# EAGLE board Projeto Rotas v18 (EAGLE 9.7.0)
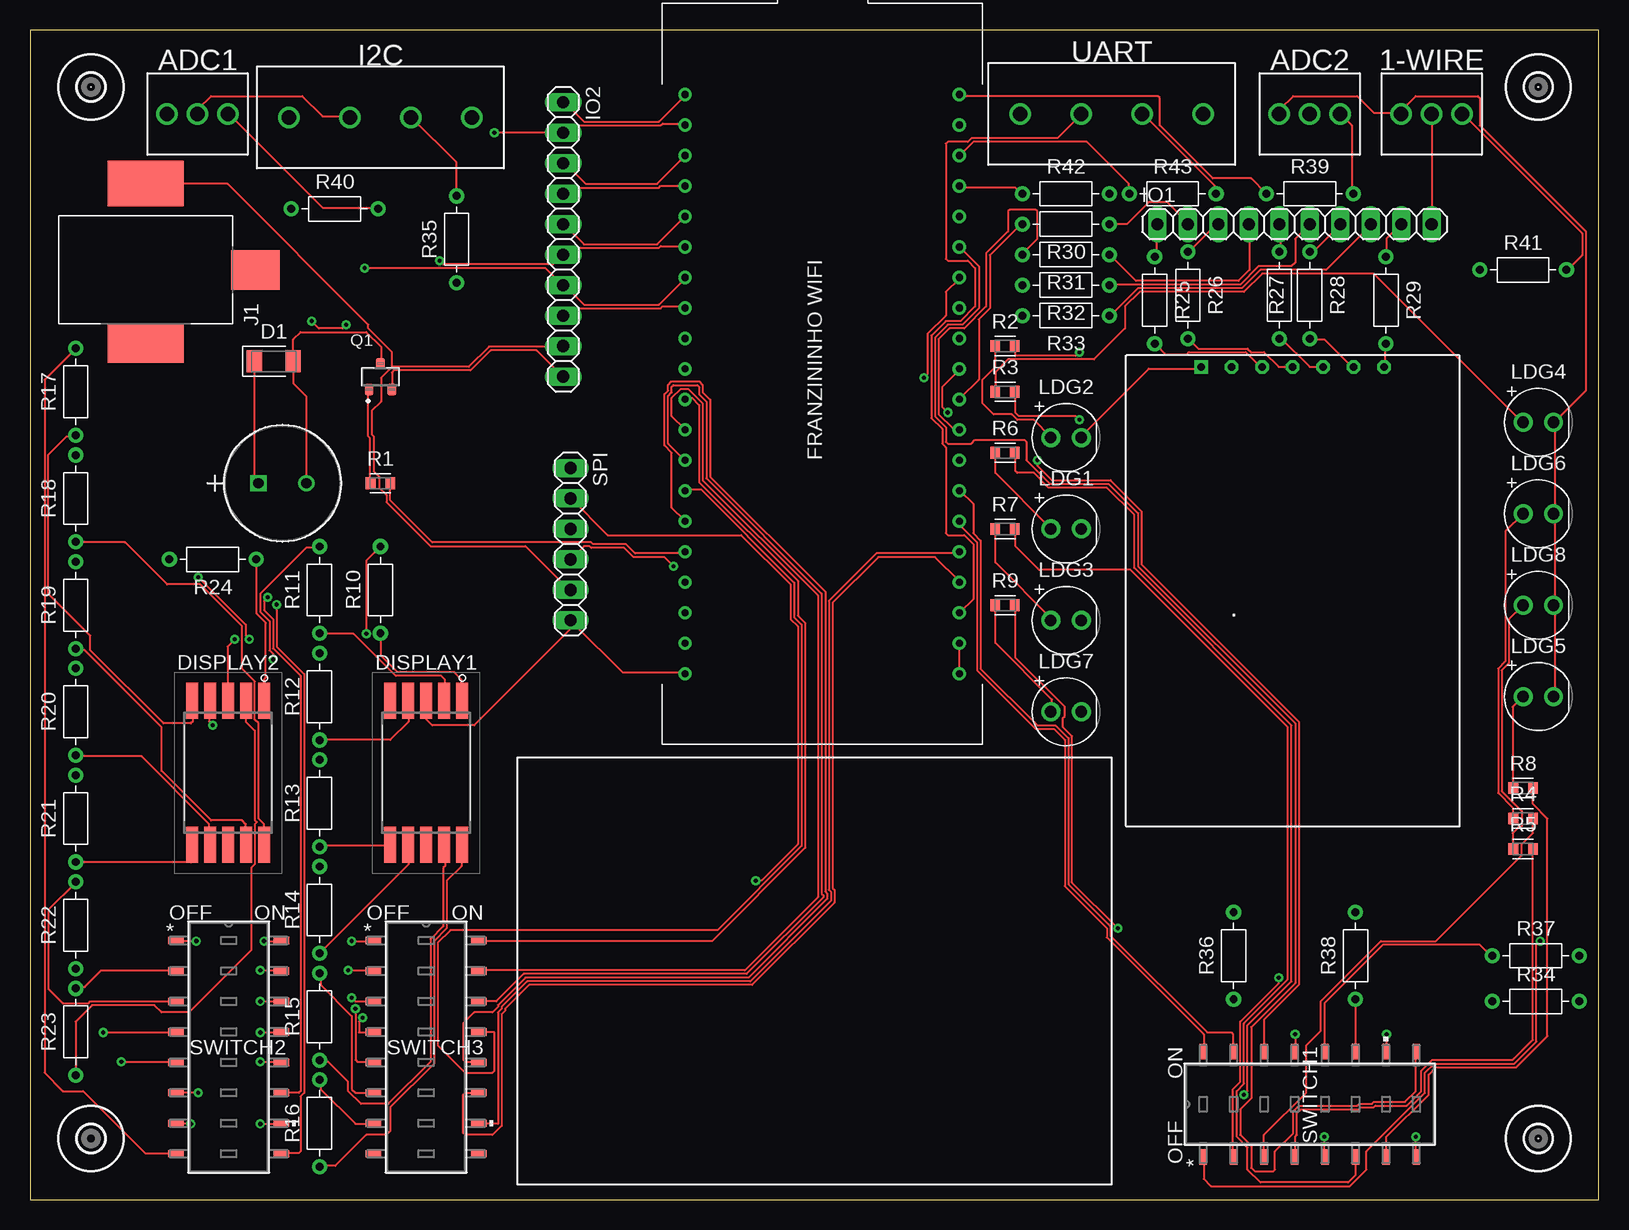
[diagram p0: board, top side]
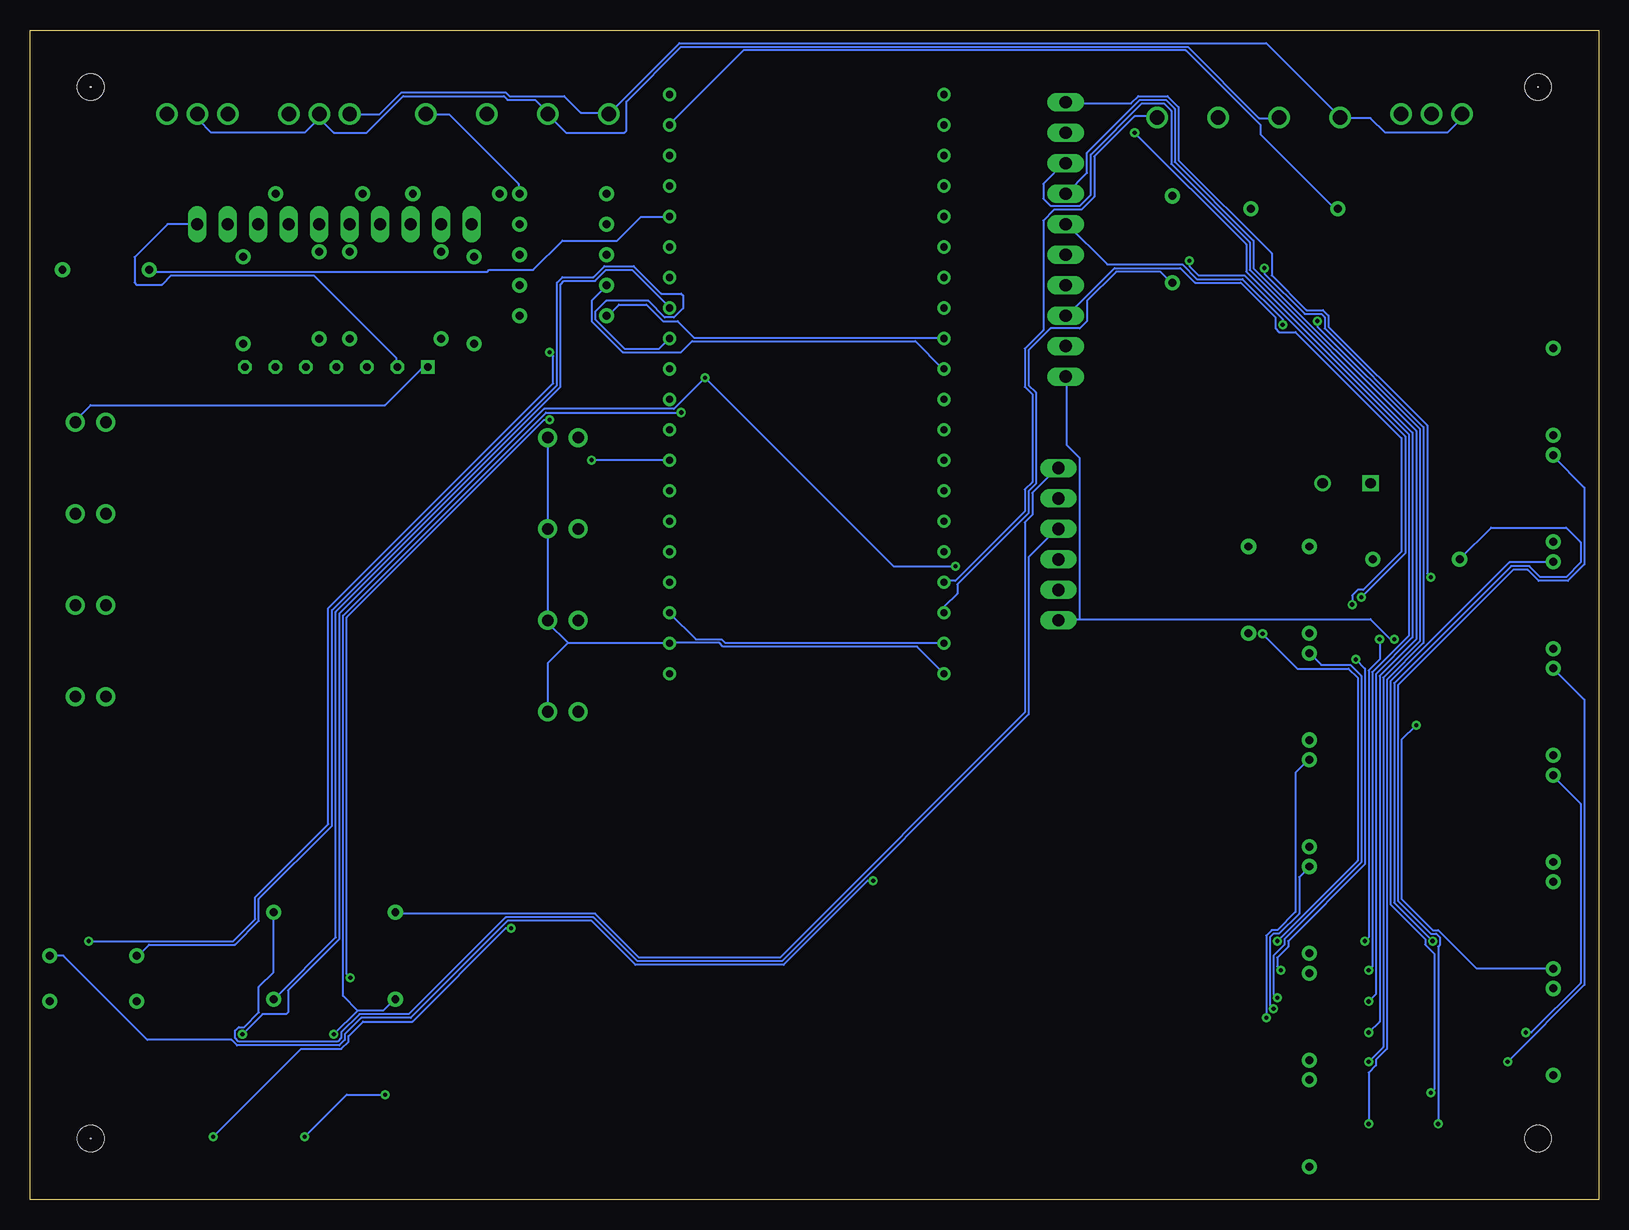
[diagram p1: board, bottom side, seen from below]

Size 130.79 x 97.46 mm. Coordinates in mm from the lower left corner, seen from the top.
Outline: 0,0 130.79,0 130.79,97.46 0,97.46 0,0
Copper layers (1*16): Top / Bottom
Stack-up Default Layer Stack: Top User Defined 0.035mm / Dielectric-1 User Defined 1.5mm / Bottom User Defined 0.035mm
Design rules "default": minimum track width 6mil, minimum drill 0.35mm, track to track 6mil, track to pad 6mil, pad to pad 6mil, via to via 6mil, smd to smd 6mil, copper to edge 40mil, drill to drill 6mil, minimum pad ring 10mil, minimum via ring 8mil, stop-mask expansion 4mil, vias tented up to drill 0mil, thermal gap 10mil
Holes 0.06 mm at 125.73,5.08 125.73,92.71 5.08,92.71

## Footprints (pad centres in the part's own frame; a part is rotated, then mirrored left to right if it is on the bottom)
TERMBLK_254-3N = drill 1.2: 1 0,0; 2 2.54,0; 3 5.08,0
TFT = drill 0.6 octagon: BLK 7.46,17.31; DC 4.92,17.31; RES 2.38,17.31; SCL -2.7,17.31; SDA -0.16,17.31; VCC -5.24,17.31 | drill 0.6 square: GND -7.78,17.31
PB-09N23P-03Q_MAL = drill 0.864 pad 1.372 square: 1 0,0 | drill 0.864 pad 1.372: 2 4,0
DIOMELF3516 = smd 1.275 x 1.85: 1 -1.62,0; 2 1.62,0
ACSA0341SRWAF01 = smd 1 x 3: 1 -3,-6; 2 -1.5,-6; 3 0,-6; 4 1.5,-6; 5 3,-6; 6 3,6; 7 1.5,6; 8 0,6; 9 -1.5,6; 10 -3,6
2,2 = hole 2.2: 0,0
TERMBLK_508-4N = drill 1.2: 1 0,0; 2 5.08,0; 3 10.16,0; 4 15.24,0
1X10 = drill 1.016 long: 1 -11.43,0; 2 -8.89,0; 3 -6.35,0; 4 -3.81,0; 5 -1.27,0; 6 1.27,0; 7 3.81,0; 8 6.35,0; 9 8.89,0; 10 11.43,0
RASM722X = smd 3.3 x 4.06: PIN 0,9.14 | smd 3.3 x 6.35: SHUNT 6.1,0 | smd 3.81 x 6.35: SLEEVE -7.19,0
LEDGR254W60D565H860B_Y = drill 0.981 pad 1.581: 1 -1.27,0; 2 1.27,0
SOT23 = smd 0.71 x 0.96: 1 -0.95,-1.075; 2 0.95,-1.075; 3 0,1.075
RESC1608X60 = smd 0.799 x 0.974: 1 -0.815,0; 2 0.815,0
RESAD724W46L381D178B = drill 0.66 pad 1.26: 1 -3.62,0; 2 3.62,0
1X06 = drill 1.016 long: 1 -6.35,0; 2 -3.81,0; 3 -1.27,0; 4 1.27,0; 5 3.81,0; 6 6.35,0
SWSO16_386X100P100-L = smd 1.295 x 0.61: 1 -4.407,8.89; 2 -4.407,6.35; 3 -4.407,3.81; 4 -4.407,1.27; 5 -4.407,-1.27; 6 -4.407,-3.81; 7 -4.407,-6.35; 8 -4.407,-8.89; 9 4.407,-8.89; 10 4.407,-6.35; 11 4.407,-3.81; 12 4.407,-1.27; 13 4.407,1.27; 14 4.407,3.81; 15 4.407,6.35; 16 4.407,8.89
FRANZININHO = drill 0.6: 3V3 -11.43,-21.59; 5V 11.43,-19.05; GND1 -11.43,-24.13; GND2 11.43,-21.59; GND3 11.43,-24.13; GPIO0 -11.43,24.13; GPIO1 -11.43,21.59; GPIO2 -11.43,19.05; GPIO3 -11.43,16.51; GPIO4 -11.43,13.97; GPIO5 -11.43,11.43; GPIO6 -11.43,8.89; GPIO7 -11.43,6.35; GPIO8 -11.43,-16.51; GPIO9 -11.43,-19.05; GPIO10 -11.43,3.81; GPIO11 -11.43,1.27; GPIO12 -11.43,-1.27; GPIO13 -11.43,-3.81; GPIO14 -11.43,-6.35; GPIO15 -11.43,-8.89; GPIO16 -11.43,-11.43; GPIO17 -11.43,-13.97; GPIO18 11.43,-16.51; GPIO21 11.43,-13.97; GPIO26 11.43,-11.43; GPIO33 11.43,-8.89; GPIO34 11.43,-6.35; GPIO35 11.43,-3.81; GPIO36 11.43,-1.27; GPIO37 11.43,1.27; GPIO38 11.43,3.81; GPIO39 11.43,6.35; GPIO40 11.43,8.89; GPIO41 11.43,11.43; GPIO42 11.43,13.97; GPIO43 11.43,16.51; GPIO44 11.43,19.05; GPIO45 11.43,21.59; GPIO46 11.43,24.13

## Placement (x,y rotation side)
1-WIRE  2828XX-3282834-3  [TERMBLK_254-3N]  119.38,90.46 180 top
.  DISPLAY240X240IPSTFT  [TFT]  105.41,52.07 0 top
ADC1  2828XX-3282834-3  [TERMBLK_254-3N]  16.51,90.46 180 top
ADC2  2828XX-3282834-3  [TERMBLK_254-3N]  109.22,90.46 180 top
BUZZER  PB-09N23P-03QPB-09N23P-03Q_MAL  [PB-09N23P-03Q_MAL]  19.05,59.69 0 top
D1  LL4148  [DIOMELF3516]  20.32,69.85 0 top
DISPLAY1  ACSA03-41  [ACSA0341SRWAF01]  33.02,35.56 180 top
DISPLAY2  ACSA03-41  [ACSA0341SRWAF01]  16.51,35.56 180 top
H1  MOUNT-HOLE2.2  [2,2]  125.73,5.08 0 top
H2  MOUNT-HOLE2.2  [2,2]  5.08,5.08 0 top
H3  MOUNT-HOLE2.2  [2,2]  125.73,92.71 0 top
H4  MOUNT-HOLE2.2  [2,2]  5.08,92.71 0 top
I2C  2828XX-4282837-4  [TERMBLK_508-4N]  36.83,90.17 180 top
IO1  PINHD-1X10  [1X10]  105.41,81.28 0 top
IO2  PINHD-1X10  [1X10]  44.45,80.01 270 top
J1  RASM722  [RASM722X]  9.65,77.47 270 top
LDG1  [LEDGR254W60D565H860B_Y]  86.36,55.88 0 top
LDG2  [LEDGR254W60D565H860B_Y]  86.36,63.5 0 top
LDG3  [LEDGR254W60D565H860B_Y]  86.36,48.26 0 top
LDG4  [LEDGR254W60D565H860B_Y]  125.73,64.77 0 top
LDG5  [LEDGR254W60D565H860B_Y]  125.73,41.91 0 top
LDG6  [LEDGR254W60D565H860B_Y]  125.73,57.15 0 top
LDG7  [LEDGR254W60D565H860B_Y]  86.36,40.64 0 top
LDG8  [LEDGR254W60D565H860B_Y]  125.73,49.53 0 top
Q1  MMBT3904  [SOT23]  29.21,68.58 0 top
R1  [RESC1608X60]  29.21,59.69 0 top
R2  [RESC1608X60]  81.28,71.12 0 top
R3  [RESC1608X60]  81.28,67.31 0 top
R4  [RESC1608X60]  124.46,31.75 0 top
R5  [RESC1608X60]  124.46,29.21 0 top
R6  [RESC1608X60]  81.28,62.23 0 top
R7  [RESC1608X60]  81.28,55.88 0 top
R8  [RESC1608X60]  124.46,34.29 0 top
R9  [RESC1608X60]  81.28,49.53 0 top
R10  [RESAD724W46L381D178B]  29.21,50.8 90 top
R11  [RESAD724W46L381D178B]  24.13,50.8 90 top
R12  [RESAD724W46L381D178B]  24.13,41.91 90 top
R13  [RESAD724W46L381D178B]  24.13,33.02 90 top
R14  [RESAD724W46L381D178B]  24.13,24.13 90 top
R15  [RESAD724W46L381D178B]  24.13,15.24 90 top
R16  [RESAD724W46L381D178B]  24.13,6.35 90 top
R17  [RESAD724W46L381D178B]  3.81,67.31 90 top
R18  [RESAD724W46L381D178B]  3.81,58.42 90 top
R19  [RESAD724W46L381D178B]  3.81,49.53 90 top
R20  [RESAD724W46L381D178B]  3.81,40.64 90 top
R21  [RESAD724W46L381D178B]  3.81,31.75 90 top
R22  [RESAD724W46L381D178B]  3.81,22.86 90 top
R23  [RESAD724W46L381D178B]  3.81,13.97 90 top
R24  [RESAD724W46L381D178B]  15.24,53.34 180 top
R25  [RESAD724W46L381D178B]  93.75,74.93 270 top
R26  [RESAD724W46L381D178B]  96.52,75.35 270 top
R27  [RESAD724W46L381D178B]  104.14,75.35 270 top
R28  [RESAD724W46L381D178B]  106.68,75.35 270 top
R29  [RESAD724W46L381D178B]  113.03,74.93 270 top
R30  [RESAD724W46L381D178B]  86.36,81.28 180 top
R31  [RESAD724W46L381D178B]  86.36,78.74 180 top
R32  [RESAD724W46L381D178B]  86.36,76.2 180 top
R33  [RESAD724W46L381D178B]  86.36,73.66 180 top
R34  [RESAD724W46L381D178B]  125.52,16.51 0 top
R35  [RESAD724W46L381D178B]  35.56,80.01 90 top
R36  [RESAD724W46L381D178B]  100.33,20.32 90 top
R37  [RESAD724W46L381D178B]  125.52,20.32 0 top
R38  [RESAD724W46L381D178B]  110.49,20.32 90 top
R39  [RESAD724W46L381D178B]  106.68,83.82 0 top
R40  [RESAD724W46L381D178B]  25.4,82.55 0 top
R41  [RESAD724W46L381D178B]  124.46,77.47 0 top
R42  [RESAD724W46L381D178B]  86.36,83.82 0 top
R43  [RESAD724W46L381D178B]  95.25,83.82 0 top
SPI  PINHD-1X6  [1X06]  45.05,54.61 270 top
SWITCH1  1-1825006-5SWSO16_386X100P100-L  [SWSO16_386X100P100-L]  106.68,7.95 90 top
SWITCH2  1-1825006-5SWSO16_386X100P100-L  [SWSO16_386X100P100-L]  16.56,12.7 0 top
SWITCH3  1-1825006-5SWSO16_386X100P100-L  [SWSO16_386X100P100-L]  33.02,12.7 0 top
U$1  FRANZININHO-WIFI  [FRANZININHO]  66.04,67.95 0 top
U$2  MINI-PROTOBOARD  [MINI-PROTOBOARD]  40.64,19.05 90 top
UART  2828XX-4282837-4  [TERMBLK_508-4N]  97.79,90.46 180 top

## Library data of the parts
1-WIRE ADC1 ADC2 = Connector; CATEGORY: Connector; DESCRIPTION: TERM BLK 3P SIDE ENT 2.54mm PCB; MANUFACTURER: TE Connectivity; MPN: 282834-3; OPERATING_TEMPERATURE: -40°C to +105°C; PART_STATUS: Active; ROHS_COMPLIANCE: RoHS Compliant; SERIES: 282834; SUBCATEGORY: Terminal Block; TYPE: Side Wire Entry
. = TFT Display
BUZZER = buzzer new v2; COPYRIGHT: Copyright (C) 2022 Ultra Librarian. All rights reserved.; MANUFACTURER_PART_NUMBER: PB-09N23P-03Q; MFR_NAME: Mallory Sonalert
D1 = Diode; CATEGORY: Diode; DESCRIPTION: DIODE GEN PURP 100V 200MA SOD80; MANUFACTURER: ON Semiconductor; SUB-CATEGORY: Rectifier
DISPLAY1 DISPLAY2 = Display_LED; CATEGORY: Display; COLOUR: RED; CONFIGURATION: COMMON ANODE; DIGIT: Single; DIGIT_HEIGHT: 0.3inch; MANUFACTURER: Kingbright; MPN: ACSA03-41SRWA-F01; OPERATING_TEMPERATURE: -40°C To +85°C; PART_STATUS: ACTIVE; ROHS_COMPLIANT: COMPLIANT; SERIES: -; SUB_CATEGORY: LED; TYPE: 7-Segment
H1-H4 = holes
I2C UART = Connector; CATEGORY: Connector; DESCRIPTION: TERM BLK 4P SIDE ENT 5.08mm PCB; MANUFACTURER: TE Connectivity; MPN: 282837-4; OPERATING_TEMPERATURE: 40°C to +105°C; PART_STATUS: Active; ROHS_COMPLIANCE: RoHS Compliant; SERIES: 283737; SUBCATEGORY: Terminal Block; TYPE: Side Wire Entry
IO1 IO2 SPI = Connector; CATEGORY: CONNECTOR; SUB-CATEGORY: PIN-HEADER
J1 = Connector; CREATED_BY: PCBLayout.com; DIGI-KEY_PART_NO: RASM722X-ND; MANUFACTURER: Switchcraft Inc.; MPN: RASM722X
LDG1-LDG8 = Library
Q1 = Transistor; CREATED_BY: PCBLayout.com; DIGIKEY_PART_NUMBER: MMBT3904FSCT-ND; MANUFACTURER: ON Semiconductor; MPN: MMBT3904; PACKAGE: SOT-23-3
R1-R43 = Resistor; CATEGORY: Resistor; SUB-CATEGORY: Fixed
SWITCH1-SWITCH3 = Switches; BUILT_BY: EMA_UL_Team; CATEGORY: DIP & SIP Switches; COPYRIGHT: Copyright (C) 2016 Accelerated Designs. All rights reserved; DESCRIPTION: GDS08S04=DIP SW,SLIDE,SMT; MANUFACTURER_PART_NUMBER: 1-1825006-5; PART_STATUS: active; SERIES: Alcoswitch DIP,Alcoswitch DIP GDS; VENDOR: TE Connectivity
U$1 = Frazininho Symbolo
U$2 = mini-protoboard

## Nets
+5V: BUZZER.1 D1.1
GND: 1-WIRE.3 ..GND ADC1.3 ADC2.3 DISPLAY1.3 DISPLAY2.3 I2C.4 IO2.10 LDG1.2 LDG2.2 LDG3.2 LDG4.2 LDG5.2 LDG6.2 LDG7.2 LDG8.2 Q1.2 SPI.6 U$1.GND1 U$1.GND2 U$1.GND3 UART.4
GND-FONT: J1.SHUNT
GPIO0: IO2.1 SWITCH2.16 U$1.GPIO0
GPIO1: IO2.2 SWITCH2.15 U$1.GPIO1
GPIO2: IO2.3 SWITCH2.14 U$1.GPIO2
GPIO3: IO2.4 SWITCH2.13 U$1.GPIO3
GPIO4: IO2.5 SWITCH2.12 U$1.GPIO4
GPIO5: IO2.6 SWITCH2.11 U$1.GPIO5
GPIO6: IO2.7 SWITCH2.10 U$1.GPIO6
GPIO7: IO2.8 SWITCH2.9 U$1.GPIO7
GPIO8: I2C.1 U$1.GPIO8
GPIO9: R35.1 U$1.GPIO9
GPIO10: R33.2 U$1.GPIO10
GPIO11: R32.2 U$1.GPIO11
GPIO12: SWITCH3.16 U$1.GPIO12
GPIO13: SWITCH3.15 U$1.GPIO13
GPIO14: SWITCH3.14 U$1.GPIO14
GPIO15: SWITCH3.13 U$1.GPIO15
GPIO16: SWITCH3.12 U$1.GPIO16
GPIO17: R1.2 U$1.GPIO17
GPIO18: SWITCH3.11 U$1.GPIO18
GPIO21: SWITCH3.10 U$1.GPIO21
GPIO26: SWITCH1.16 U$1.GPIO26
GPIO33: SWITCH1.15 U$1.GPIO33
GPIO34: SWITCH1.14 U$1.GPIO34
GPIO35: R31.2 U$1.GPIO35
GPIO36: R30.2 U$1.GPIO36
GPIO37: R36.1 SWITCH1.13 U$1.GPIO37
GPIO38: R37.1 SWITCH1.12 U$1.GPIO38
GPIO39: R38.1 SWITCH1.11 U$1.GPIO39
GPIO40: SPI.4 SWITCH1.10 U$1.GPIO40
GPIO41: SWITCH1.9 U$1.GPIO41
GPIO42: R41.1 U$1.GPIO42
GPIO43: R42.1 U$1.GPIO43
GPIO44: R43.1 U$1.GPIO44
GPIO45: R40.1 U$1.GPIO45
GPIO46: R39.1 U$1.GPIO46
N$1: ..SCL R25.2
N$2: BUZZER.2 D1.2 Q1.3
N$3: ..SDA R26.2
N$4: Q1.1 R1.1
N$5: ..RES R27.2
N$6: R10.2 SWITCH3.1
N$7: ..DC R28.2
N$8: I2C.2 R35.2
N$9: ..BLK R29.2
N$10: DISPLAY2.5 R17.1
N$11: R11.2 SWITCH3.2
N$12: R12.2 SWITCH3.3
N$13: LDG2.1 R2.1
N$14: R2.2 SWITCH1.1
N$15: LDG4.1 R3.1
N$16: DISPLAY1.1 R10.1
N$17: DISPLAY2.1 R24.1
N$18: R3.2 SWITCH1.2
N$19: LDG6.1 R4.1
N$20: LDG8.1 R5.1
N$21: DISPLAY2.2 R23.1
N$22: DISPLAY2.4 R22.1
N$23: DISPLAY1.2 R11.1
N$24: DISPLAY1.4 R12.1
N$25: LDG1.1 R6.1
N$26: LDG3.1 R7.1
N$27: LDG5.1 R8.1
N$28: LDG7.1 R9.1
N$29: R4.2 SWITCH1.3
N$30: R5.2 SWITCH1.4
N$31: R6.2 SWITCH1.5
N$32: R7.2 SWITCH1.6
N$33: R8.2 SWITCH1.7
N$34: R9.2 SWITCH1.8
N$35: DISPLAY2.6 R21.1
N$36: DISPLAY2.7 R20.1
N$37: DISPLAY2.9 R19.1
N$38: DISPLAY2.10 R18.1
N$39: DISPLAY1.6 R13.1
N$40: DISPLAY1.7 R14.1
N$41: DISPLAY1.9 R15.1
N$42: DISPLAY1.10 R16.1
N$43: R13.2 SWITCH3.4
N$44: R14.2 SWITCH3.5
N$45: R15.2 SWITCH3.6
N$46: R16.2 SWITCH3.7
N$47: R17.2 SWITCH2.8
N$48: R18.2 SWITCH2.7
N$49: R19.2 SWITCH2.6
N$50: R20.2 SWITCH2.5
N$51: R21.2 SWITCH2.4
N$52: R22.2 SWITCH2.3
N$53: R23.2 SWITCH2.2
N$54: R24.2 SWITCH2.1
N$55: IO1.1 R25.1
N$56: IO1.3 R26.1
N$57: IO1.5 R27.1
N$58: IO1.7 R28.1
N$59: IO1.9 R29.1
N$60: IO1.2 R30.1
N$61: IO1.4 R31.1
N$62: IO1.6 R32.1
N$63: IO1.8 R33.1
N$64: R36.2 SPI.1
N$65: R37.2 SPI.2
N$66: R38.2 SPI.3
N$67: R43.2 UART.2
N$68: ADC2.1 R39.2
N$69: ADC1.1 R40.2
N$70: 1-WIRE.1 R41.2
N$71: R42.2 UART.1
VCC: 1-WIRE.2 ..VCC ADC1.2 ADC2.2 I2C.3 IO1.10 U$1.3V3 U$1.5V UART.3
VCC-FONT: IO2.9 J1.SLEEVE SPI.5
VOLT: J1.PIN

## Tracks (layer width: path | path; a pad name or v marks a point on that pad's centre or on a via)
+5V
  Top 0.152: D1.1 18.75,69.85 18.75,60.1 19.05,59.79 BUZZER.1
GND  (via drill 0.35)
  Top 0.152: U$1.GND3 77.42,43.94 77.42,46.23 U$1.GND2 | ..GND 97.54,69.24 93.27,69.24 87.63,63.6 LDG2.2 | Q1.2 30.18,67.56 30.18,68.94 30.33,69.09 36.73,69.09 38.41,70.76 42.22,70.76 44.35,68.63 IO2.10 | 45.41,47.9 45.11,48.21 SPI.6 45.41,47.9 | 45.41,47.9 49.38,43.94 54.56,43.94 U$1.GND1 | v17.07,46.69 16.46,46.08 16.46,41.66 DISPLAY2.3 | 45.41,47.9 37.03,39.52 33.53,39.52 33.07,39.98 33.07,41.5 DISPLAY1.3 | LDG5.2 127.1,41.96 127.1,49.43 LDG8.2 127.1,49.58 127.1,57.05 LDG6.2 127.1,57.2 127.1,64.67 LDG4.2 127.1,64.82 129.69,67.41 129.69,80.67 120.85,89.51 120.85,91.8 120.7,91.95 115.52,91.95 114.15,90.58 | 114.15,90.58 112.01,90.58 110.64,91.95 105.31,91.95 104.24,90.88 104.24,90.58 ADC2.3 | 114.15,90.58 114.3,90.58 1-WIRE.3 114.15,90.58
  Bottom 0.152: 85.95,46.38 77.57,46.38 U$1.GND2 77.42,46.38 73.3,46.38 73,46.08 56.84,46.08 54.71,43.94 U$1.GND1 | 85.95,46.38 87.63,48.06 LDG3.2 LDG1.2 LDG2.2 | LDG7.2 87.63,44.7 85.95,46.38 | v17.07,46.69 17.37,46.69 19.05,48.36 43.28,48.36 | 43.28,48.36 44.96,48.36 SPI.6 | 43.28,48.36 43.28,61.77 44.35,62.84 44.35,68.48 IO2.10 | ADC1.3 11.43,90.12 12.65,88.9 17.83,88.9 19.05,90.12 21.49,90.12 I2C.4 21.64,90.27 27.74,96.37 76.66,96.37 82.45,90.58 UART.4 82.6,90.58 84.89,90.58 86.26,91.95 90.83,91.95 91.14,92.25 99.82,92.25 101.65,90.42 104.09,90.42 ADC2.3 | ..GND 97.69,69.24 98.15,69.24 101.19,66.19 125.73,66.19 127.1,64.82 LDG4.2
GPIO0  (via drill 0.35)
  Top 0.152: v19.51,21.54 20.88,21.54 SWITCH2.16 | v18.29,46.69 17.98,46.99 17.98,47.9 v14.02,51.87 | U$1.GPIO0 54.56,91.95 52.43,89.81 46.18,89.81 44.5,91.49 IO2.1
  Bottom 0.152: v19.51,21.54 19.2,21.84 19.2,44.09 18.29,45.01 v18.29,46.69 | v14.02,51.87 14.33,52.17 14.33,64.52 22.55,72.75 22.55,73.66 23.01,74.12 24.38,74.12 27.28,77.01 27.28,78.84 35.05,86.61 35.05,91.03 35.97,91.95 38.41,91.95 39.01,91.34 44.35,91.34 IO2.1
GPIO1  (via drill 0.35)
  Top 0.152: v19.2,19.1 20.88,19.1 SWITCH2.15 | v38.71,88.9 IO2.2 44.5,88.9 45.11,89.51 52.58,89.51 52.73,89.66 54.56,89.66 U$1.GPIO1
  Bottom 0.152: v19.2,19.1 18.9,19.41 18.9,43.94 15.85,46.99 15.85,63.75 29.41,77.32 29.41,79.6 v38.71,88.9
GPIO2  (via drill 0.35)
  Top 0.152: v19.2,16.51 SWITCH2.14 | U$1.GPIO2 54.56,86.92 52.27,84.63 46.33,84.63 44.5,86.46 IO2.3
  Bottom 0.152: v19.2,16.51 18.59,17.12 18.59,43.79 15.54,46.84 15.54,63.91 29.11,77.47 29.11,79.76 35.66,86.31 35.66,90.73 36.27,91.34 38.1,91.34 42.37,87.07 42.37,83.72 43.28,82.8 45.72,82.8 46.33,83.41 46.33,84.63 44.5,86.46 IO2.3
GPIO3  (via drill 0.35)
  Top 0.152: v19.2,13.92 20.88,13.92 SWITCH2.13 | IO2.4 44.96,84.33 52.43,84.33 52.58,84.48 54.56,84.48 U$1.GPIO3
  Bottom 0.152: v19.2,13.92 18.29,14.83 18.29,43.64 15.24,46.69 15.24,64.06 28.8,77.62 28.8,79.91 35.36,86.46 35.36,90.88 36.12,91.64 38.25,91.64 42.67,87.22 42.67,85.55 44.35,83.87 IO2.4
GPIO4  (via drill 0.35)
  Top 0.152: v19.2,11.48 20.88,11.48 SWITCH2.12 | v23.47,73.2 24.08,72.59 26.06,72.59 v26.36,72.9 | U$1.GPIO4 54.56,81.89 52.27,79.6 46.18,79.6 44.5,81.28 IO2.5
  Bottom 0.152: v19.2,11.48 17.98,12.7 17.98,43.48 14.94,46.53 14.94,64.21 23.47,72.75 v23.47,73.2 | v26.36,72.9 26.36,73.35 29.72,76.71 33.53,76.71 34.75,77.93 41,77.93 44.35,81.28 IO2.5
GPIO5  (via drill 0.35)
  Top 0.152: SWITCH2.11 22.4,8.89 22.55,9.04 22.55,43.64 20.27,45.92 20.27,48.36 19.51,49.12 19.51,49.89 v19.81,50.19 | v34.14,78.23 34.44,77.93 43.59,77.93 44.35,78.69 IO2.6 44.5,78.84 44.96,79.3 52.43,79.3 52.58,79.45 54.56,79.45 U$1.GPIO5
  Bottom 0.152: v19.81,50.19 16.15,53.85 16.15,63.6 29.57,77.01 33.38,77.01 34.14,77.77 v34.14,78.23
GPIO6  (via drill 0.35)
  Top 0.152: v19.2,6.3 20.88,6.3 SWITCH2.10 | v27.89,77.62 42.98,77.62 44.35,76.25 IO2.7 44.5,76.25 46.18,74.57 52.43,74.57 54.56,76.71 U$1.GPIO6
  Bottom 0.152: v19.2,6.3 19.2,10.57 18.59,11.18 18.59,11.63 17.68,12.55 17.68,43.33 14.63,46.38 14.63,64.36 22.86,72.59 22.86,73.51 23.16,73.81 24.54,73.81 27.89,77.16 v27.89,77.62
GPIO7  (via drill 0.35)
  Top 0.152: v20.57,49.58 20.57,46.08 22.86,43.79 22.86,8.89 22.55,8.59 22.55,4.01 22.4,3.86 21.03,3.86 SWITCH2.9 | U$1.GPIO7 54.56,74.42 52.73,74.42 52.58,74.27 45.11,74.27 44.5,73.66 IO2.8
  Bottom 0.152: v20.57,49.58 20.57,50.34 20.12,50.8 19.66,50.8 16.46,54 16.46,63.45 25.3,72.29 26.67,72.29 26.98,72.59 26.98,73.51 29.87,76.4 33.68,76.4 34.9,77.62 40.39,77.62 44.35,73.66 IO2.8
GPIO8
  Bottom 0.152: U$1.GPIO8 54.56,51.56 53.65,51.56 47.85,57.35 47.85,59.18 47.24,59.79 47.24,67.11 47.85,67.72 47.85,70.92 46.33,72.44 46.33,81.58 45.41,82.5 43.13,82.5 42.06,83.57 42.06,86.92 38.71,90.27 36.88,90.27 I2C.1
GPIO9
  Bottom 0.152: U$1.GPIO9 54.56,48.97 54.56,49.43 53.49,50.49 53.49,51.26 47.55,57.2 47.55,59.03 46.94,59.64 46.94,67.26 47.55,67.87 47.55,70.76 45.72,72.59 43.28,72.59 42.67,73.2 42.67,74.88 40.23,77.32 36.58,77.32 35.66,76.4 R35.1
GPIO10
  Bottom 0.152: U$1.GPIO10 54.71,71.83 75.44,71.83 76.81,73.2 78.03,73.2 79.4,74.57 81.69,74.57 82.6,73.66 R33.2
GPIO11
  Bottom 0.152: U$1.GPIO11 54.71,69.24 57,71.53 75.59,71.53 76.5,70.61 81.38,70.61 83.97,73.2 83.97,74.88 82.75,76.1 R32.2
GPIO12
  Top 0.152: SWITCH3.16 37.49,21.54 56.84,21.54 64.62,29.31 64.62,48.06 64.01,48.67 64.01,51.56 55.78,59.79 55.78,66.19 55.17,66.8 54.71,66.8 U$1.GPIO12
GPIO13
  Top 0.152: SWITCH3.15 37.49,19.1 59.59,19.1 65.68,25.2 65.68,50.34 56.08,59.94 56.08,66.34 54.86,67.56 54.25,67.56 53.49,66.8 53.49,65.28 54.56,64.21 U$1.GPIO13
GPIO14
  Top 0.152: SWITCH3.14 38.86,16.51 41.15,18.8 59.74,18.8 66.14,25.2 66.14,25.35 65.99,25.5 65.99,50.49 56.39,60.1 56.39,66.5 55.78,67.11 55.78,67.72 55.63,67.87 53.65,67.87 53.49,67.72 53.49,67.26 53.19,66.95 53.19,62.99 54.56,61.62 U$1.GPIO14
GPIO15
  Top 0.152: SWITCH3.13 37.49,13.92 38.71,13.92 38.71,10.72 38.56,10.57 36.27,10.57 33.98,12.85 33.98,21.39 35.05,22.45 57.3,22.45 64.31,29.46 64.31,47.9 63.7,48.51 63.7,51.41 55.93,59.18 54.71,59.18 U$1.GPIO15
GPIO16
  Top 0.152: SWITCH3.12 37.34,11.48 36.27,11.48 36.12,11.63 36.12,14.68 37.03,15.6 38.56,15.6 39.01,16.05 39.01,16.21 41.3,18.49 59.89,18.49 66.45,25.04 66.45,25.5 66.29,25.65 66.29,50.65 56.69,60.25 56.69,66.65 56.08,67.26 56.08,67.87 55.78,68.17 53.49,68.17 53.19,67.87 53.19,67.41 52.88,67.11 52.88,62.84 53.49,62.23 53.49,57.66 54.56,56.59 U$1.GPIO16
GPIO17
  Top 0.152: R1.2 30.02,59.64 30.02,58.27 33.53,54.76 46.79,54.76 46.94,54.61 49.68,54.61 50.44,53.85 54.56,53.85 U$1.GPIO17
GPIO18
  Top 0.152: SWITCH3.11 36.27,8.89 36.12,8.74 36.12,5.54 36.27,5.38 38.56,5.38 39.32,6.15 39.32,15.44 39.62,15.75 39.62,15.9 41.6,17.88 60.2,17.88 67.06,24.74 67.06,25.81 66.9,25.96 66.9,49.73 70.71,53.54 75.44,53.54 77.42,51.56 U$1.GPIO18
GPIO21
  Top 0.152: SWITCH3.10 37.49,6.3 39.01,6.3 39.01,15.6 39.32,15.9 39.32,16.05 41.45,18.19 60.05,18.19 66.75,24.89 66.75,25.65 66.6,25.81 66.6,49.89 70.56,53.85 77.42,53.85 U$1.GPIO21
GPIO26
  Top 0.152: SWITCH1.16 97.84,12.39 97.84,13.77 89.76,21.84 89.76,22.61 86.26,26.11 86.26,38.3 85.34,39.22 83.82,39.22 78.94,44.09 78.94,54.76 77.57,56.13 77.57,56.44 U$1.GPIO26
GPIO33
  Top 0.152: SWITCH1.15 100.28,12.39 100.28,13.77 100.13,13.92 98.15,13.92 90.07,22 90.07,22.76 86.56,26.26 86.56,38.46 85.5,39.52 83.97,39.52 79.25,44.25 79.25,54.91 78.64,55.52 78.64,57.96 77.57,59.03 U$1.GPIO33
GPIO34  (via drill 0.35)
  Top 0.152: SWITCH1.14 102.87,14.99 105.77,17.88 105.77,39.83 92.66,52.93 92.66,57.35 90.07,59.94 85.19,59.94 83.97,61.16 v83.97,61.62
  Bottom 0.152: v83.97,61.62 77.57,61.62 U$1.GPIO34
GPIO35
  Top 0.152: U$1.GPIO35 77.42,64.21 76.96,64.21 75.74,65.43 75.74,71.68 76.66,72.59 77.88,72.59 79.7,74.42 79.7,78.84 81.53,80.67 81.53,82.35 81.69,82.5 83.82,82.5 83.97,82.35 83.97,80.06 82.75,78.84 R31.2
GPIO36
  Top 0.152: U$1.GPIO36 77.57,66.8 79.1,68.33 79.1,73.35 80.01,74.27 80.01,78.69 82.6,81.28 R30.2
GPIO37  (via drill 0.35)
  Top 0.152: v105.46,13.77 105.46,12.39 SWITCH1.13 | v76.5,65.58 76.05,66.04 76.05,67.72 77.42,69.09 U$1.GPIO37
  Bottom 0.152: 103.48,15.75 v105.46,13.77 | 103.48,15.75 101.35,15.75 100.43,16.66 R36.1 | v76.5,65.58 87.78,65.58 104.7,48.67 104.7,16.97 103.48,15.75
GPIO38
  Top 0.152: SWITCH1.12 107.9,12.39 107.9,16.36 112.78,21.23 120.85,21.23 121.77,20.32 R37.1
  Bottom 0.152: U$1.GPIO38 77.57,71.68 78.33,70.92 81.23,70.92 83.67,73.35 83.67,73.96 82.75,74.88 79.25,74.88 77.88,73.51 77.11,73.51 76.35,74.27 76.35,75.34 76.5,75.49 78.18,75.49 80.47,77.77 82.91,77.77 83.82,76.86 86.41,76.86 86.87,76.4 86.87,67.87 105.61,49.12 105.61,31.14 111.71,25.04 111.71,23.22 113.69,21.23 120.85,21.23 121.77,20.32 R37.1
GPIO39
  Top 0.152: R38.1 SWITCH1.11
  Bottom 0.152: U$1.GPIO39 77.57,74.42 80.62,77.47 82.75,77.47 83.67,76.56 86.26,76.56 86.56,76.25 86.56,67.72 105.31,48.97 105.31,21.84 110.49,16.66 R38.1
GPIO40  (via drill 0.35)
  Top 0.152: v113.08,13.77 113.08,12.39 SWITCH1.10 | v74.52,68.48 74.83,68.78 74.83,72.14 76.35,73.66 76.35,75.64 77.42,76.71 U$1.GPIO40 | v53.65,52.78 52.88,53.54 50.29,53.54 49.53,54.3 46.79,54.3 46.63,54.46 46.18,54.46 45.11,53.39 SPI.4
  Bottom 0.152: v113.08,13.77 111.4,15.44 109.42,15.44 109.27,15.6 109.27,17.42 105,21.69 105,48.82 87.94,65.89 77.11,65.89 v74.52,68.48 58.83,52.78 v53.65,52.78
GPIO41
  Top 0.152: SWITCH1.9 115.52,12.24 115.52,9.04 114.61,8.13 112.01,8.13 111.86,7.98 110.8,7.98 110.64,7.82 105.77,7.82 105.31,7.37 105.31,5.54 103.78,4.01 103.78,2.49 103.63,2.34 102.11,2.34 101.8,2.64 101.8,4.47 100.89,5.38 100.89,7.52 101.8,8.43 101.8,14.38 105.46,18.03 105.46,39.68 92.35,52.78 92.35,57.2 89.92,59.64 85.04,59.64 83.06,61.62 83.06,63.14 82.91,63.3 78.79,63.3 78.49,62.99 76.5,62.99 76.35,63.14 76.35,64.36 75.44,65.28 75.44,71.83 76.5,72.9 77.72,72.9 79.1,74.27 79.1,77.77 77.57,79.3 U$1.GPIO41
GPIO42
  Bottom 0.152: U$1.GPIO42 77.57,81.89 79.86,81.89 81.84,79.91 86.41,79.91 88.85,77.47 92.51,77.47 92.66,77.32 120.55,77.32 120.7,77.47 R41.1
GPIO43
  Top 0.152: U$1.GPIO43 77.57,84.33 82.14,84.33 82.6,83.87 R42.1
GPIO44
  Top 0.152: U$1.GPIO44 77.57,87.07 78.64,88.14 88.09,88.14 91.59,84.63 91.59,83.87 R43.1
GPIO45
  Bottom 0.152: U$1.GPIO45 77.42,89.66 71.32,95.76 34.44,95.76 28.19,89.51 28.19,88.75 22.1,82.65 21.79,82.65 R40.1
GPIO46
  Top 0.152: U$1.GPIO46 77.57,91.95 94.03,91.95 94.18,91.8 94.18,89.51 98.6,85.09 101.8,85.09 103.02,83.87 R39.1
N$1
  Top 0.152: ..SCL 102.56,69.39 101.35,70.61 96.62,70.61 96.47,70.46 94.64,70.46 93.88,71.22 R25.2
N$2
  Top 0.152: D1.2 21.95,71.68 22.55,72.29 28.04,72.29 29.26,71.07 29.26,69.7 Q1.3 | D1.2 21.95,68.02 23.01,66.95 23.01,59.79 BUZZER.2 | D1.2
N$3
  Top 0.152: ..SDA 105.16,69.39 104.09,69.39 102.87,70.61 101.8,70.61 101.5,70.92 97.38,70.92 96.62,71.68 R26.2
N$4
  Top 0.152: Q1.1 28.19,67.41 28.19,63.6 28.35,63.45 28.35,59.79 R1.1
N$5
  Top 0.152: ..RES 107.75,69.39 106.68,69.39 104.24,71.83 R27.2
N$6  (via drill 0.35)
  Top 0.152: v26.82,21.54 28.5,21.54 SWITCH3.1 | v28.04,47.14 28.04,53.24 29.11,54.3 R10.2
  Bottom 0.152: v26.82,21.54 20.12,28.25 20.12,43.48 20.88,44.25 25.15,44.25 v28.04,47.14
N$7
  Top 0.152: ..DC 110.19,69.39 107.9,71.68 106.68,71.68 R28.2
N$8
  Top 0.152: R35.2 35.51,83.72 35.51,86.46 31.85,90.12 I2C.2
N$9
  Top 0.152: ..BLK 112.93,69.39 112.93,71.22 R29.2
N$10
  Top 0.152: R17.1 3.81,63.6 3.05,63.6 1.52,62.08 1.52,50.49 5.03,46.99 5.03,45.77 11.12,39.68 13.41,39.68 13.56,39.83 13.56,41.5 DISPLAY2.5
N$11  (via drill 0.35)
  Top 0.152: v26.52,19.1 28.5,19.1 SWITCH3.2 | v20.27,45.01 20.27,45.47 19.96,45.77 19.96,48.21 19.2,48.97 19.2,50.49 23.01,54.3 24.08,54.3 R11.2
  Bottom 0.152: v26.52,19.1 26.82,19.41 26.82,20.17 25.91,21.08 25.91,21.54 19.51,27.94 19.51,44.25 v20.27,45.01
N$12  (via drill 0.35)
  Top 0.152: SWITCH3.3 27.13,16.51 v26.82,16.82
  Bottom 0.152: v26.82,16.82 27.13,17.12 27.13,20.32 26.21,21.23 26.21,21.69 19.81,28.09 19.81,43.64 20.73,44.55 23.16,44.55 24.08,45.47 R12.2
N$13
  Top 0.152: R2.1 80.47,71.07 80.47,69.39 79.4,68.33 79.4,66.34 80.31,65.43 81.84,65.43 82.3,64.97 83.67,64.97 85.04,63.6 LDG2.1
N$14  (via drill 0.35)
  Top 0.152: v87.48,70.61 87.17,70.31 82.14,70.31 82.14,71.07 R2.2 | v125.88,21.54 125.58,21.23 125.58,13.16 123.75,11.33 117.04,11.33 116.28,10.57 116.28,8.89 111.4,4.01 111.4,2.49 110.03,1.12 98.45,1.12 97.84,1.73 97.84,3.4 SWITCH1.1
  Bottom 0.152: v87.48,70.61 87.17,70.31 87.17,68.02 105.92,49.28 105.92,31.29 112.01,25.2 112.01,23.37 113.84,21.54 v125.88,21.54
N$15
  Top 0.152: R3.1 80.47,67.41 80.47,68.94 81.53,70 88.7,70 91.29,72.59 91.29,74.42 92.51,75.64 101.19,75.64 102.72,77.16 112.01,77.16 124.36,64.82 LDG4.1
N$16
  Top 0.152: R10.1 29.26,47.14 29.26,45.31 30.63,43.94 35.36,43.94 35.97,43.33 35.97,41.66 DISPLAY1.1
N$17
  Top 0.152: R24.1 18.9,53.24 18.9,48.82 19.66,48.06 19.66,43.48 19.51,43.33 19.51,41.66 DISPLAY2.1
N$18  (via drill 0.35)
  Top 0.152: v87.48,64.97 87.17,65.28 82.45,65.28 82.14,65.58 82.14,67.26 R3.2 | v104.09,18.49 104.09,18.03 100.89,14.83 100.89,9.8 100.28,9.2 100.28,3.56 SWITCH1.2
  Bottom 0.152: v87.48,64.97 87.94,64.97 104.39,48.51 104.39,18.8 v104.09,18.49
N$19
  Top 0.152: LDG6.1 122.99,55.68 122.99,44.86 122.38,44.25 122.38,33.88 123.6,32.66 123.6,31.75 R4.1
N$20
  Top 0.152: LDG8.1 123.29,48.36 123.29,44.7 122.68,44.09 122.68,34.04 124.36,32.36 124.36,31.14 124.21,30.99 124.05,30.99 123.6,30.53 123.6,29.31 R5.1
N$21
  Top 0.152: R23.1 3.81,14.83 5.18,16.21 10.36,16.21 10.97,15.6 13.26,15.6 18.44,20.78 18.44,27.64 18.75,27.94 18.75,31.29 18.9,31.45 18.75,31.6 18.75,39.06 17.98,39.83 17.98,41.5 DISPLAY2.2
N$22  (via drill 0.35)
  Top 0.152: v15.24,39.52 14.94,39.83 14.94,41.5 DISPLAY2.4
  Bottom 0.152: v15.24,39.52 16.46,38.3 16.46,25.04 13.87,22.45 13.41,22.45 10.21,19.25 3.81,19.25 R22.1
N$23
  Top 0.152: R11.1 24.23,47.14 26.98,47.14 30.48,43.64 34.29,43.64 34.59,43.33 34.59,41.66 DISPLAY1.2
N$24
  Top 0.152: R12.1 24.23,38.3 30.02,38.3 31.55,39.83 31.55,41.5 DISPLAY1.4
N$25
  Top 0.152: R6.1 80.47,60.55 85.04,55.98 LDG1.1
N$26
  Top 0.152: R7.1 80.47,55.83 80.47,53.09 85.19,48.36 LDG3.1
N$27
  Top 0.152: LDG5.1 123.6,41.05 123.6,34.34 R8.1
N$28
  Top 0.152: R9.1 80.47,49.43 80.47,46.38 85.19,41.66 85.19,40.74 LDG7.1
N$29
  Top 0.152: SWITCH1.3 102.87,5.38 106.38,8.89 106.38,12.85 107.59,14.07 107.59,16.51 112.62,21.54 117.2,21.54 124.36,28.7 124.36,29.62 125.27,30.53 R4.2
N$30
  Top 0.152: R5.2 125.27,29.16 125.27,13.31 123.6,11.63 116.89,11.63 115.98,10.72 115.98,9.04 114.76,7.82 112.17,7.82 112.01,7.67 110.95,7.67 110.8,7.52 105.92,7.52 105.61,7.21 105.61,5.38 105.46,5.23 105.46,3.56 SWITCH1.4
N$31  (via drill 0.35)
  Top 0.152: v101.19,8.74 101.5,9.04 101.5,14.53 105.16,18.19 105.16,39.52 92.05,52.63 92.05,57.05 89.76,59.33 84.89,59.33 83.67,60.55 82.3,60.55 82.14,60.71 82.14,62.23 R6.2 | v107.9,5.23 107.9,3.56 SWITCH1.5
  Bottom 0.152: v101.19,8.74 104.39,8.74 v107.9,5.23
N$32
  Top 0.152: SWITCH1.6 110.49,2.03 109.88,1.42 102.56,1.42 101.5,2.49 101.5,4.32 100.58,5.23 100.58,9.04 101.19,9.65 101.19,14.68 104.85,18.34 104.85,39.37 91.75,52.48 84.12,52.48 82.14,54.46 82.14,55.83 R7.2
N$33
  Top 0.152: R8.2 125.27,34.19 125.27,32.97 126.49,31.75 126.49,13.61 123.9,11.02 117.2,11.02 116.59,10.41 116.59,8.74 113.08,5.23 113.08,3.56 SWITCH1.7
N$34  (via drill 0.35)
  Top 0.152: v90.68,22.61 86.87,26.42 86.87,38.61 86.11,39.37 86.11,40.13 86.26,40.28 86.26,41.05 82.14,45.16 82.14,49.43 R9.2 | v115.52,5.23 115.52,3.56 SWITCH1.8
  Bottom 0.152: v90.68,22.61 91.14,22.61 98.91,14.83 103.02,14.83 104.24,13.61 104.24,13.16 104.85,12.55 108.2,12.55 v115.52,5.23
N$35
  Top 0.152: R21.1 3.81,28.09 13.41,28.09 13.56,28.25 13.56,29.46 DISPLAY2.6
N$36
  Top 0.152: R20.1 3.81,36.93 9.3,36.93 14.94,31.29 14.94,29.62 DISPLAY2.7
N$37
  Top 0.152: R19.1 3.81,45.77 4.57,45.77 10.97,39.37 10.97,35.71 15.09,31.6 17.68,31.6 17.98,31.29 17.98,29.62 DISPLAY2.9
N$38
  Top 0.152: R18.1 3.81,54.76 7.92,54.76 11.43,51.26 14.17,51.26 17.68,47.75 17.68,44.25 18.75,43.18 18.75,39.98 19.05,39.68 19.05,31.75 19.51,31.29 19.51,29.62 DISPLAY2.10
N$39
  Top 0.152: R13.1 24.23,29.46 29.87,29.46 DISPLAY1.6
N$40
  Top 0.152: R14.1 24.23,20.62 31.55,27.94 31.55,29.46 DISPLAY1.7
N$41
  Top 0.152: R15.1 24.23,11.48 24.84,11.48 26.52,9.8 26.52,9.04 27.58,7.98 29.87,7.98 33.38,11.48 33.38,21.69 34.44,22.76 34.44,27.64 34.59,27.79 34.59,29.46 DISPLAY1.9
N$42
  Top 0.152: R16.1 24.23,2.79 25.45,2.79 28.04,5.38 29.72,5.38 30.02,5.69 30.02,7.67 33.68,11.33 33.68,21.54 34.75,22.61 34.75,26.57 35.97,27.79 35.97,29.46 DISPLAY1.10
N$43  (via drill 0.35)
  Top 0.152: v27.74,15.14 27.43,14.83 27.43,13.92 28.5,13.92 SWITCH3.4
  Bottom 0.152: v27.74,15.14 27.74,22 27.28,22.45 26.82,22.45 25.3,23.98 25.3,35.56 24.23,36.63 R13.2
N$44  (via drill 0.35)
  Top 0.152: v27.13,15.9 27.13,11.63 27.28,11.48 28.5,11.48 SWITCH3.5
  Bottom 0.152: v27.13,15.9 27.43,16.21 27.43,21.84 27.13,22.15 26.67,22.15 24.99,23.82 24.99,26.87 24.23,27.64 R14.2
N$45
  Top 0.152: SWITCH3.6 27.13,8.89 26.82,9.2 26.82,15.29 24.23,17.88 24.23,18.8 R15.2
N$46
  Top 0.152: SWITCH3.7 28.5,6.3 27.13,6.3 24.23,9.2 24.23,9.96 R16.2
N$47
  Top 0.152: SWITCH2.8 12.04,3.86 9.6,3.86 4.42,9.04 2.74,9.04 1.22,10.57 1.22,68.33 3.81,70.92 R17.2
N$48  (via drill 0.35)
  Top 0.152: v13.41,6.3 12.19,6.3 SWITCH2.7
  Bottom 0.152: v13.41,6.3 13.41,21.08 13.26,21.23 13.26,21.84 13.56,22.15 14.02,22.15 16.76,24.89 16.76,42.88 7.16,52.48 5.94,52.48 5.03,51.56 2.59,51.56 1.22,52.93 1.22,59.33 3.81,61.93 R18.2
N$49  (via drill 0.35)
  Top 0.152: v14.02,8.89 SWITCH2.6
  Bottom 0.152: v14.02,8.89 13.72,9.2 13.72,20.47 14.48,21.23 14.48,21.69 17.37,24.59 17.37,43.18 7.47,53.09 3.81,53.09 R19.2
N$50  (via drill 0.35)
  Top 0.152: v7.62,11.48 12.04,11.48 SWITCH2.5
  Bottom 0.152: v7.62,11.48 1.22,17.88 1.22,41.66 3.81,44.25 R20.2
N$51  (via drill 0.35)
  Top 0.152: v6.1,13.92 12.04,13.92 SWITCH2.4
  Bottom 0.152: v6.1,13.92 5.64,13.92 1.52,18.03 1.52,32.97 3.81,35.26 R21.2
N$52
  Top 0.152: SWITCH2.3 5.03,16.51 4.88,16.36 2.74,16.36 1.52,17.58 1.52,24.13 3.81,26.42 R22.2
N$53
  Top 0.152: SWITCH2.2 12.04,19.1 5.94,19.1 4.57,17.73 3.81,17.73 R23.2
N$54  (via drill 0.35)
  Top 0.152: v13.87,21.54 12.19,21.54 SWITCH2.1
  Bottom 0.152: v13.87,21.54 17.07,24.74 17.07,43.03 7.32,52.78 5.79,52.78 4.88,51.87 2.74,51.87 1.52,53.09 1.52,54.76 2.74,55.98 8.99,55.98 11.58,53.39 R24.2
N$55
  Top 0.152: R25.1 93.88,78.69 93.88,81.28 IO1.1
N$56
  Top 0.152: IO1.3 98.91,81.28 96.62,78.99 R26.1
N$57
  Top 0.152: R27.1 104.24,78.99 104.24,81.28 IO1.5
N$58
  Top 0.152: R28.1 106.68,78.99 106.98,78.99 109.27,81.28 IO1.7
N$59
  Top 0.152: IO1.9 113.08,80.06 113.08,78.69 R29.1
N$60
  Top 0.152: R30.1 91.44,81.28 93.27,83.11 94.79,83.11 96.62,81.28 IO1.2
N$61
  Top 0.152: R31.1 90.07,78.69 92.2,76.56 100.74,76.56 101.65,77.47 101.65,81.28 IO1.4
N$62
  Top 0.152: IO1.6 105.46,80.06 105.46,78.08 105.16,77.77 102.41,77.77 100.89,76.25 90.07,76.25 R32.1
N$63
  Top 0.152: R33.1 90.07,73.66 92.35,75.95 101.04,75.95 102.56,77.47 108.05,77.47 111.86,81.28 IO1.8
N$64
  Bottom 0.152: R36.2 100.28,23.82 83.67,23.82 80.01,20.17 68.28,20.17 47.85,40.59 47.85,56.44 47.24,57.05 47.24,58.88 45.11,61.01 SPI.1
N$65  (via drill 0.35)
  Top 0.152: v60.5,26.57 60.96,26.57 64.01,29.62 64.01,47.75 63.4,48.36 63.4,51.26 59.28,55.37 48.16,55.37 45.11,58.42 SPI.2
  Bottom 0.152: R37.2 128.02,20.32 121.01,13.31 114,13.31 113.54,12.85 105,12.85 104.55,13.31 104.55,13.77 103.17,15.14 99.06,15.14 90.98,23.22 83.97,23.22 80.31,19.56 67.97,19.56 60.96,26.57 v60.5,26.57
N$66
  Bottom 0.152: R38.2 110.49,18.95 111.71,17.73 111.71,15.6 112.93,14.38 113.39,14.38 113.69,14.07 113.69,13.46 113.39,13.16 105.16,13.16 104.85,13.46 104.85,13.92 103.33,15.44 99.21,15.44 91.14,23.52 83.82,23.52 80.16,19.86 68.12,19.86 47.55,40.44 47.55,53.54 45.11,55.98 SPI.3
N$67
  Top 0.152: R43.2 98.75,83.87 98.75,84.48 92.81,90.42 UART.2
N$68
  Top 0.152: R39.2 110.19,83.87 110.19,89.51 109.27,90.42 ADC2.1
N$69
  Top 0.152: R40.2 28.96,82.65 24.38,82.65 16.61,90.42 ADC1.1
N$70
  Top 0.152: R41.2 128.17,77.47 129.39,78.69 129.39,80.52 119.48,90.42 1-WIRE.1
N$71
  Bottom 0.152: R42.2 90.07,83.87 90.07,84.63 95.86,90.42 97.69,90.42 UART.1
VCC
  Top 0.152: 1-WIRE.2 116.89,90.42 116.89,81.28 IO1.10 | I2C.3 26.67,90.27 24.38,90.27 22.71,91.95 15.09,91.95 14.02,90.88 14.02,90.58 ADC1.2 | U$1.5V 77.57,48.97 78.64,50.04 78.64,54.61 77.88,55.37 76.5,55.37 76.35,55.52 76.35,62.69 76.05,62.99 76.05,64.21 75.13,65.13 75.13,71.98 76.35,73.2 77.57,73.2 78.79,74.42 78.79,77.62 78.18,78.23 76.5,78.23 76.35,78.38 76.35,87.99 76.5,88.14 78.18,88.14 78.49,88.44 85.65,88.44 87.63,90.42 UART.3
  Bottom 0.152: IO1.10 119.33,81.28 122.07,78.54 122.07,76.4 121.92,76.25 119.79,76.25 119.02,77.01 107.14,77.01 100.28,70.15 100.28,69.39 ..VCC | U$1.3V3 54.71,46.38 72.85,46.38 73.15,46.69 75.29,46.69 77.42,48.82 U$1.5V | 106.68,90.12 105.46,88.9 102.72,88.9 99.67,91.95 91.29,91.95 90.98,91.64 88.7,91.64 87.63,90.58 UART.3 87.63,90.42 86.11,88.9 81.23,88.9 81.08,89.05 81.08,91.49 76.5,96.06 34.29,96.06 28.35,90.12 26.67,90.12 I2C.3 | 106.68,90.12 ADC2.2 106.68,90.42 | 106.68,90.12 107.9,88.9 115.67,88.9 116.74,89.97 116.74,90.42 1-WIRE.2
VCC-FONT
  Top 0.152: 30.18,69.39 29.26,68.48 29.26,66.5 28.5,65.73 28.5,63.75 28.65,63.6 28.65,60.71 29.11,60.25 29.11,59.33 29.72,58.73 29.72,58.12 33.38,54.46 41.3,54.46 44.96,50.8 SPI.5 | 30.18,69.39 36.58,69.39 38.25,71.07 44.35,71.07 IO2.9 | 30.18,69.39 30.18,70.61 28.19,72.59 28.19,72.9 16.46,84.63 9.75,84.63 J1.SLEEVE